# EAGLE board  Elevator controlled by Arduino Circuit2 (EAGLE 7.6.0)

Size 73.58 x 63.39 mm. Coordinates in mm from the lower left corner, seen from the top.
Outline: 0,0 56.82,0 56.82,53.33 0,53.33 0,0
Copper layers (1*16): Top 0.035mm / dielectric 1.5mm / Bottom 0.035mm
Design rules "default": minimum track width 10mil, minimum drill 24mil, track to track 8mil, track to pad 8mil, pad to pad 8mil, via to via 8mil, smd to smd 8mil, copper to edge 40mil, drill to drill 8mil, minimum pad ring 10mil, minimum via ring 8mil, stop-mask expansion 4mil, vias tented up to drill 0mil, thermal gap 10mil

## Footprints (pad centres in the part's own frame; a part is rotated, then mirrored left to right if it is on the bottom)
2P-2.54-65/35MIL = drill 0.889 pad 1.651 square: 1 0,1.27 | drill 0.889 pad 1.651: 2 0,-1.27
0207/10 = drill 0.813 octagon: 1 -5.08,0; 2 5.08,0
B25V = drill 0.813 long: A 2.54,0.635; E -2.54,0.635; S 0,0.635
TL1105 = drill 1 pad 1.676: 1 -2.25,3.25; 2 2.25,3.25; 3 -2.25,-3.25; 4 2.25,-3.25
1X16P-2.54-2.54-11.6-3.0-BLACK-MALE = drill 0.889 pad 1.651 square: 1 0,19.05 | drill 0.889 pad 1.651: 2 0,16.51; 3 0,13.97; 4 0,11.43; 5 0,8.89; 6 0,6.35; 7 0,3.81; 8 0,1.27; 9 0,-1.27; 10 0,-3.81; 11 0,-6.35; 12 0,-8.89; 13 0,-11.43; 14 0,-13.97; 15 0,-16.51; 16 0,-19.05
ARDUINO_UNO = drill 1.016 pad 1.88: 0 63.5,50.8; 1 60.96,50.8; 2 58.42,50.8; 3 55.88,50.8; 3.3V 35.56,2.54; 4 53.34,50.8; 5 50.8,50.8; 5V 38.1,2.54; 6 48.26,50.8; 7 45.72,50.8; 8 41.656,50.8; 9 39.116,50.8; 10 36.576,50.8; 11 34.036,50.8; 12 31.496,50.8; 13 28.956,50.8; A0 50.8,2.54; A1 53.34,2.54; A2 55.88,2.54; A3 58.42,2.54; A4 60.96,2.54; A5 63.5,2.54; AREF 23.876,50.8; GND 26.416,50.8; GND. 43.18,2.54; GND.. 40.64,2.54; I/OREF 30.48,2.54; N/C 27.94,2.54; RESET 33.02,2.54; SCL 18.796,50.8; SDA 21.336,50.8; VIN 45.72,2.54 | hole 3.2: 66.04,7.62; 66.04,35.56; 15.24,50.8; 13.97,2.54
DIL16 = drill 0.813 long: 1 -8.89,-3.81; 2 -6.35,-3.81; 3 -3.81,-3.81; 4 -1.27,-3.81; 5 1.27,-3.81; 6 3.81,-3.81; 7 6.35,-3.81; 8 8.89,-3.81; 9 8.89,3.81; 10 6.35,3.81; 11 3.81,3.81; 12 1.27,3.81; 13 -1.27,3.81; 14 -3.81,3.81; 15 -6.35,3.81; 16 -8.89,3.81

## Placement (x,y rotation side)
MDCMotor  [2P-2.54-65/35MIL]  5,22.78 0 top
R1  1k‎Ω  [0207/10]  5,60.88 0 top
R3  100k‎Ω  [0207/10]  5,137.08 0 top  (outside the outline)
R4  1k‎Ω  [0207/10]  5,149.78 0 top  (outside the outline)
R5  4k‎Ω  [0207/10]  5,162.48 0 top  (outside the outline)
R6  20k‎Ω  [0207/10]  5,175.18 0 top  (outside the outline)
R7  40k‎Ω  [0207/10]  5,187.88 0 top  (outside the outline)
R8  80k‎Ω  [0207/10]  5,200.58 0 top  (outside the outline)
Rpot1  250k‎Ω  [B25V]  5,213.28 0 top  (outside the outline)
S1  [TL1105]  5,225.98 0 top  (outside the outline)
S2  [TL1105]  5,73.58 0 top  (outside the outline)
S3  [TL1105]  5,86.28 0 top  (outside the outline)
S4  [TL1105]  5,238.68 0 top  (outside the outline)
S5  [TL1105]  5,98.98 0 top  (outside the outline)
S6  [TL1105]  5,111.68 0 top  (outside the outline)
S7  [TL1105]  5,124.38 0 top  (outside the outline)
S8  [TL1105]  5,251.38 0 top  (outside the outline)
S9  [TL1105]  5,264.08 0 top  (outside the outline)
S10  [TL1105]  5,276.78 0 top  (outside the outline)
U2  [1X16P-2.54-2.54-11.6-3.0-BLACK-MALE]  5,48.18 0 top
UArduinoCHip  [ARDUINO_UNO]  5,10.08 0 top
UH-Bridge  [DIL16]  5,35.48 0 top

## Library data of the parts
MDCMotor R1 R3-R8 Rpot1 S1-S10 U2 UArduinoCHip UH-Bridge = AUTODESK_CIRCUITS_BREADBOARD

## Nets
N$1: UArduinoCHip.3 UH-Bridge.1
N$2: UArduinoCHip.12 UH-Bridge.2
N$3: UArduinoCHip.13 UH-Bridge.7
N$4: MDCMotor.2 UH-Bridge.3
N$5: MDCMotor.1 UH-Bridge.6
N$6: U2.6 UArduinoCHip.5
N$7: U2.11 UArduinoCHip.6
N$8: U2.12 UArduinoCHip.9
N$9: U2.13 UArduinoCHip.10
N$10: U2.14 UArduinoCHip.11
N$11: U2.4 UArduinoCHip.A0
N$12: R1.2 U2.15
N$13: S2.4
N$14: S2.1
N$15: S3.4
N$16: S3.1
N$17: S5.4
N$18: S5.1
N$19: S7.1
N$20: R3.2 S1.3 S2.2 S3.3 S4.3 S5.2 S6.2 S7.2 S8.3 S9.3 S10.3 UArduinoCHip.A1
N$21: S6.1
N$22: S7.4
N$23: S6.4
N$24: R4.1 S1.2 S2.3
N$25: R5.2 S3.2 S4.2
N$26: R6.2 S5.3 S8.2
N$27: R7.2 S6.3 S9.2
N$28: R8.2 S7.3 S10.2
N$29: R1.1 R4.2 R5.1 R6.1 R7.1 R8.1 Rpot1.A U2.2 UArduinoCHip.5V UH-Bridge.8 UH-Bridge.16
N$30: R3.1 Rpot1.E U2.1 U2.3 U2.5 U2.16 UArduinoCHip.GND.. UH-Bridge.4
N$31: Rpot1.S UArduinoCHip.A2

## Tracks (layer width: path | path; a pad name or v marks a point on that pad's centre or on a via)
N$1  (1 unrouted)
N$2  (1 unrouted)
N$3  (1 unrouted)
N$4  (1 unrouted)
N$5  (1 unrouted)
N$6  (1 unrouted)
N$7  (1 unrouted)
N$8  (1 unrouted)
N$9  (1 unrouted)
N$10  (1 unrouted)
N$11  (1 unrouted)
N$12  (1 unrouted)
N$20  (11 unrouted)
N$24  (2 unrouted)
N$25  (2 unrouted)
N$26  (2 unrouted)
N$27  (2 unrouted)
N$28  (2 unrouted)
N$29  (10 unrouted)
N$30  (7 unrouted)
N$31  (1 unrouted)